# EAGLE board untitled (EAGLE 4.16)
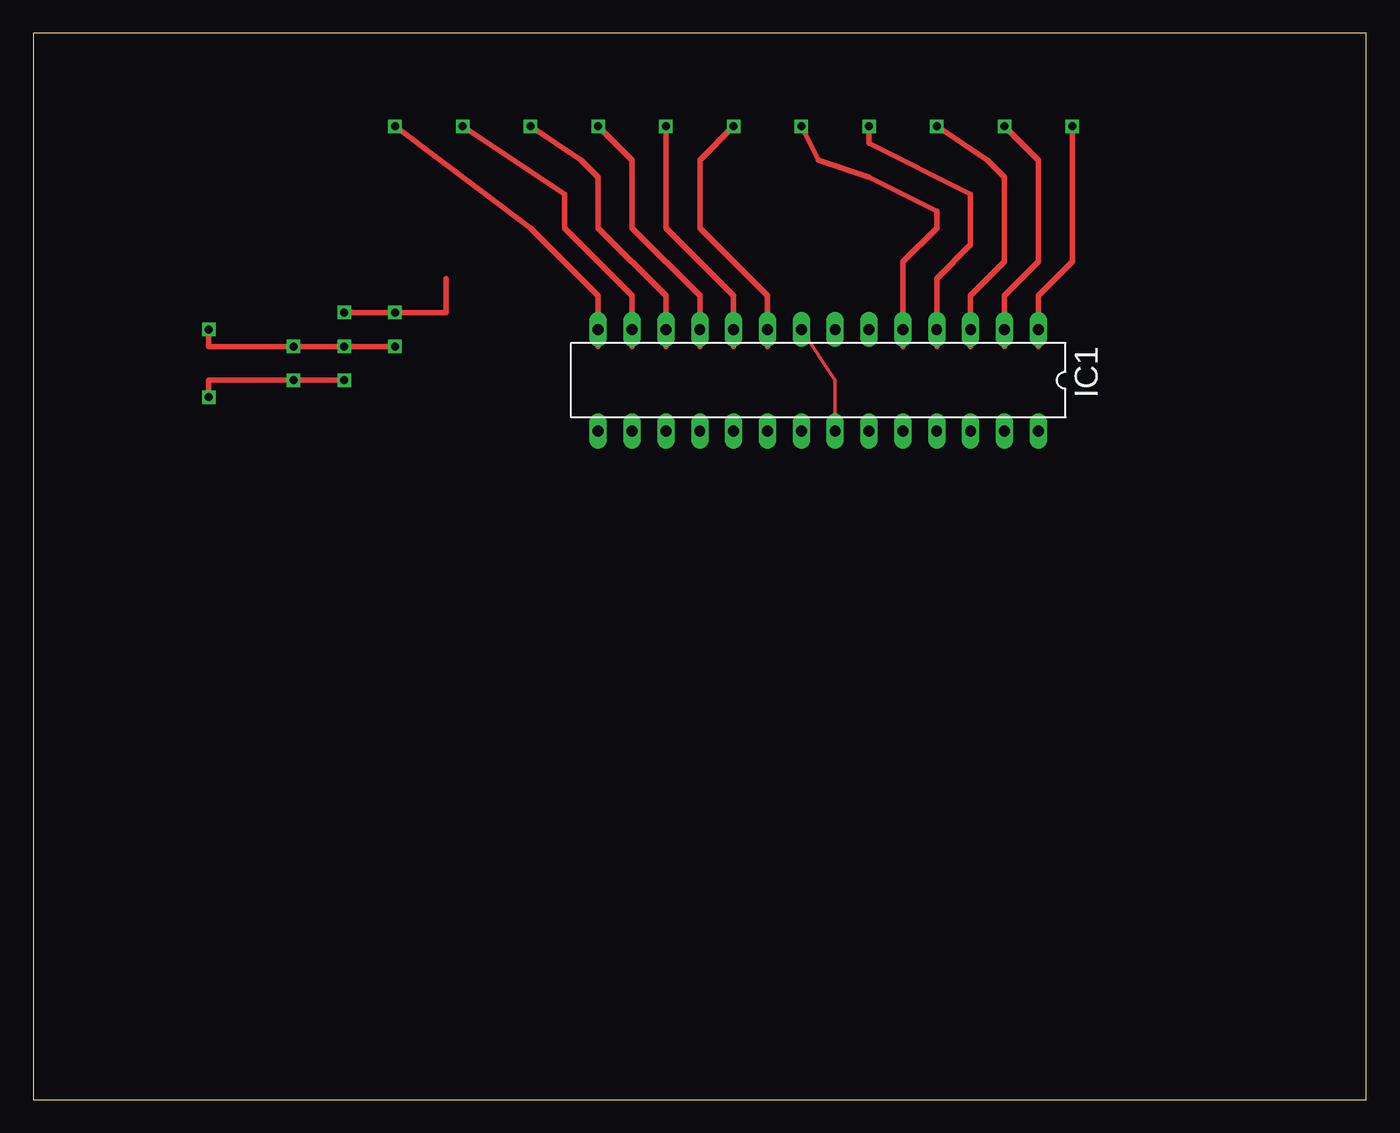
[diagram p0: board, top side]
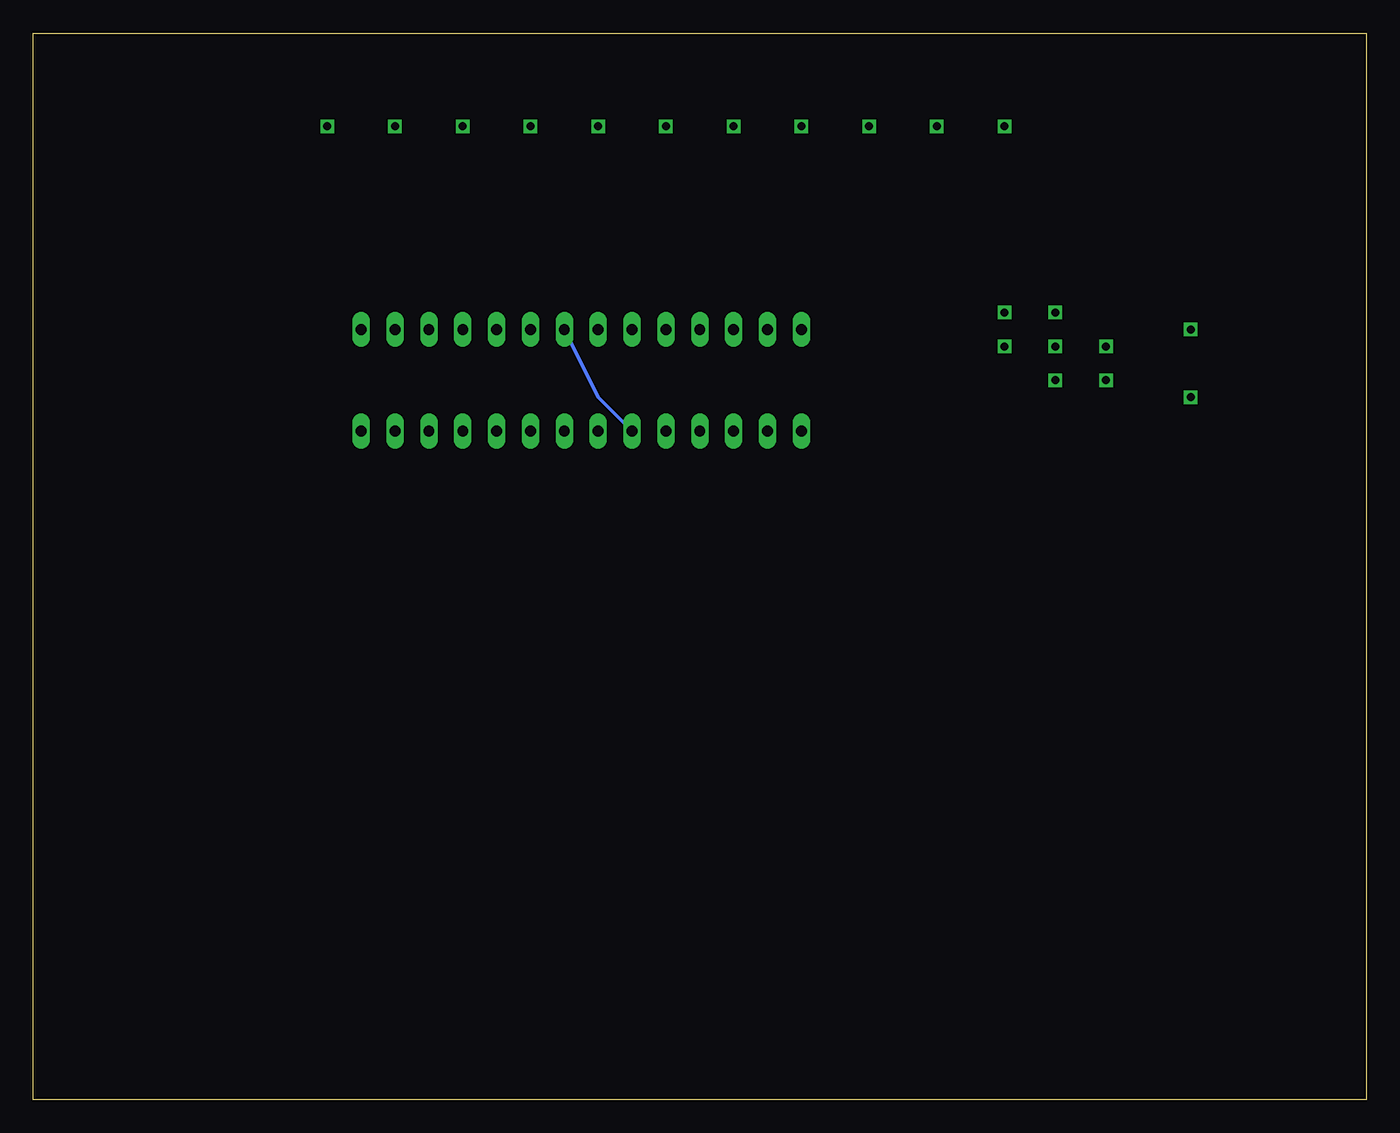
[diagram p1: board, bottom side, seen from below]

Size 100 x 80 mm. Coordinates in mm from the lower left corner, seen from the top.
Outline: 0,0 100,0 100,80 0,80 0,0
Copper layers (1*16): Top 0.035mm / dielectric 1.5mm / Bottom 0.035mm
Design rules "default": minimum track width 10mil, minimum drill 24mil, track to track 8mil, track to pad 8mil, pad to pad 8mil, via to via 8mil, smd to smd 8mil, copper to edge 40mil, drill to drill 8mil, minimum pad ring 10mil, minimum via ring 8mil, stop-mask expansion 4mil, vias tented up to drill 0mil, thermal gap 10mil

## Footprints (pad centres in the part's own frame; a part is rotated, then mirrored left to right if it is on the bottom)
DIL28-3 = drill 0.813 long: 1 -16.51,-3.81; 2 -13.97,-3.81; 3 -11.43,-3.81; 4 -8.89,-3.81; 5 -6.35,-3.81; 6 -3.81,-3.81; 7 -1.27,-3.81; 8 1.27,-3.81; 9 3.81,-3.81; 10 6.35,-3.81; 11 8.89,-3.81; 12 11.43,-3.81; 13 13.97,-3.81; 14 16.51,-3.81; 15 16.51,3.81; 16 13.97,3.81; 17 11.43,3.81; 18 8.89,3.81; 19 6.35,3.81; 20 3.81,3.81; 21 1.27,3.81; 22 -1.27,3.81; 23 -3.81,3.81; 24 -6.35,3.81; 25 -8.89,3.81; 26 -11.43,3.81; 27 -13.97,3.81; 28 -16.51,3.81

## Placement (x,y rotation side)
IC1  MEGA8-P  [DIL28-3]  58.89,53.97 180 top

## Library data of the parts
IC1 = atmel

## Nets
+5V: IC1.7 IC1.20
GND: IC1.8 IC1.22

## Tracks (layer width: path | path; a pad name or v marks a point on that pad's centre or on a via)
+5V
  Bottom 0.254: IC1.7 57.62,52.7 IC1.20
GND
  Top 0.254: IC1.8 60.16,53.97 IC1.22
N$2  (via drill 0.6)
  Top 0.406: v52.54,73.02 50,70.48 50,65.4 55.08,60.32 55.08,56.51
N$3  (via drill 0.6)
  Top 0.406: v57.62,73.02 58.89,70.48 62.7,69.21 67.78,66.67 67.78,65.4 65.24,62.86 65.24,56.51
N$4  (via drill 0.6)
  Top 0.406: v27.14,73.02 37.3,65.4 42.38,60.32 42.38,56.51
N$5  (via drill 0.6)
  Top 0.406: v32.22,73.02 39.84,67.94 39.84,65.4 44.92,60.32 44.92,56.51
N$6  (via drill 0.6)
  Top 0.406: v37.3,73.02 41.11,70.48 42.38,69.21 42.38,65.4 47.46,60.32 47.46,56.51
N$7  (via drill 0.6)
  Top 0.406: v42.38,73.02 44.92,70.48 44.92,65.4 50,60.32 50,56.51
N$8  (via drill 0.6)
  Top 0.406: v62.7,73.02 62.7,71.75 70.32,67.94 70.32,64.13 67.78,61.59 67.78,56.51
N$9  (via drill 0.6)
  Top 0.406: v47.46,73.02 47.46,65.4 52.54,60.32 52.54,56.51
N$10  (via drill 0.6)
  Top 0.406: v67.78,73.02 71.59,70.48 72.86,69.21 72.86,62.86 70.32,60.32 70.32,56.51
N$11  (via drill 0.6)
  Top 0.406: v72.86,73.02 75.4,70.48 75.4,62.86 72.86,60.32 72.86,56.51
N$12  (via drill 0.6)
  Top 0.406: v77.94,73.02 77.94,62.86 75.4,60.32 75.4,56.51
N$13  (via drill 0.6)
  Top 0.406: v23.33,59.05 30.95,59.05 30.95,60.32 30.95,61.59
N$14  (via drill 0.6)
  other vias: 23.33,56.51
N$15  (via drill 0.6)
  Top 0.406: v23.33,53.97 13.17,53.97 v13.17,52.7
N$17  (via drill 0.6)
  Top 0.406: v19.52,56.51 v27.14,56.51 13.17,56.51 v13.17,57.78
N$18  (via drill 0.6)
  other vias: 19.52,53.97
N$20  (via drill 0.6)
  other vias: 27.14,59.05